# Altium PCB Auto_Follower_Controller.PcbDoc
Units mm, origin at the board's own origin, x right, y up, seen from the top; angles counter-clockwise.
Board outline 156.93 x 77.5 mm, 2 copper layers (Top Layer, Bottom Layer); 24 components, 23 nets, 106 pads, 7 vias.
Unrouted connection lines stored in the file: 23.
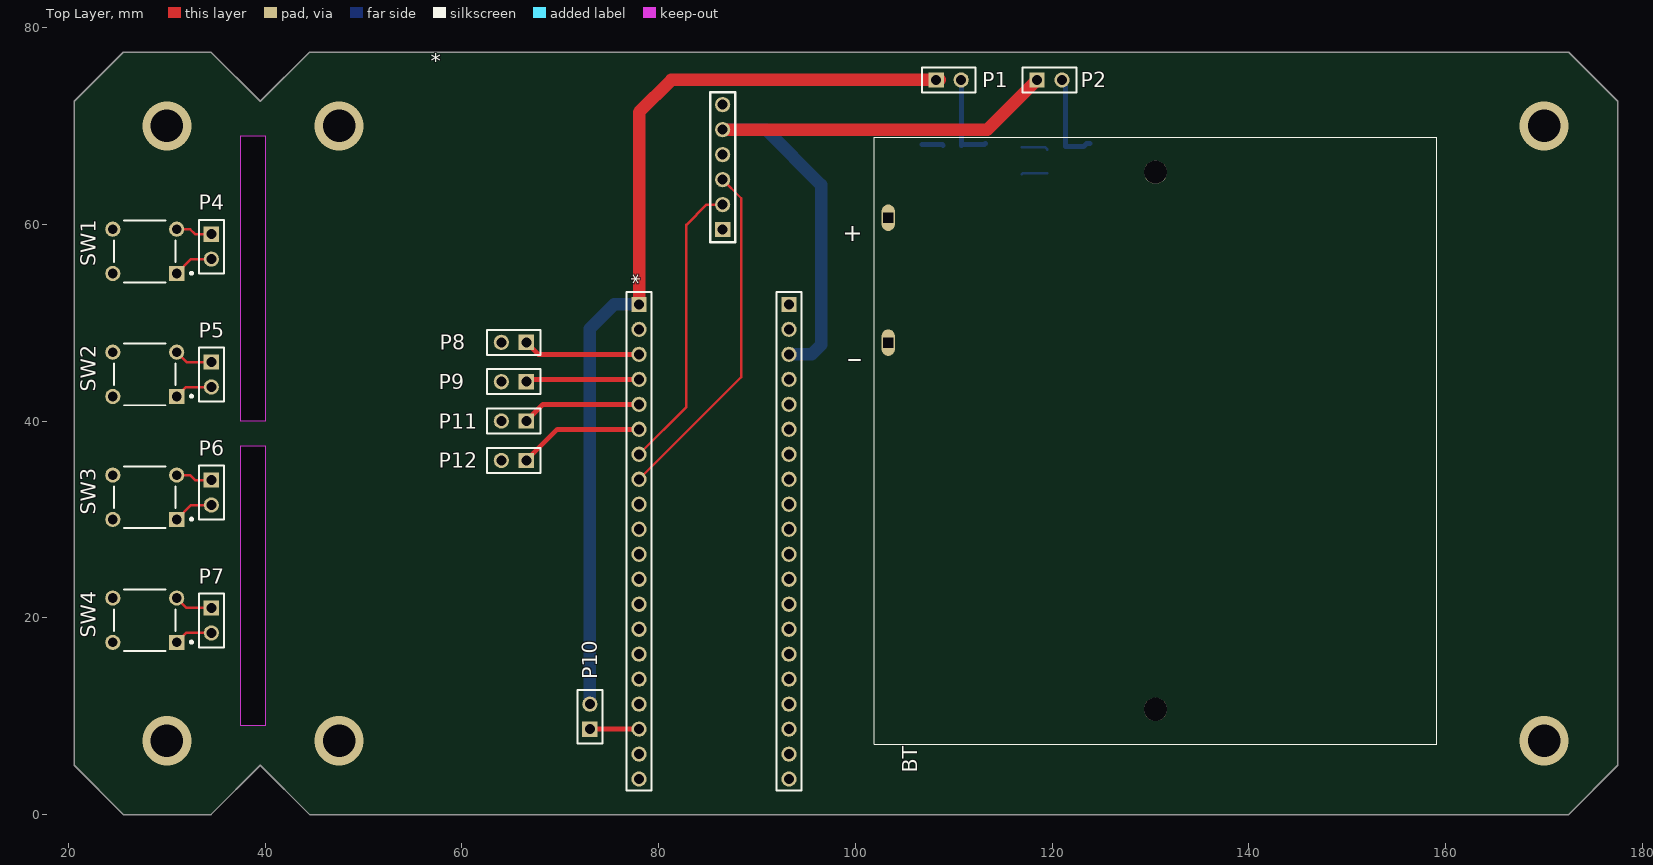
[diagram p0: Top Layer view]
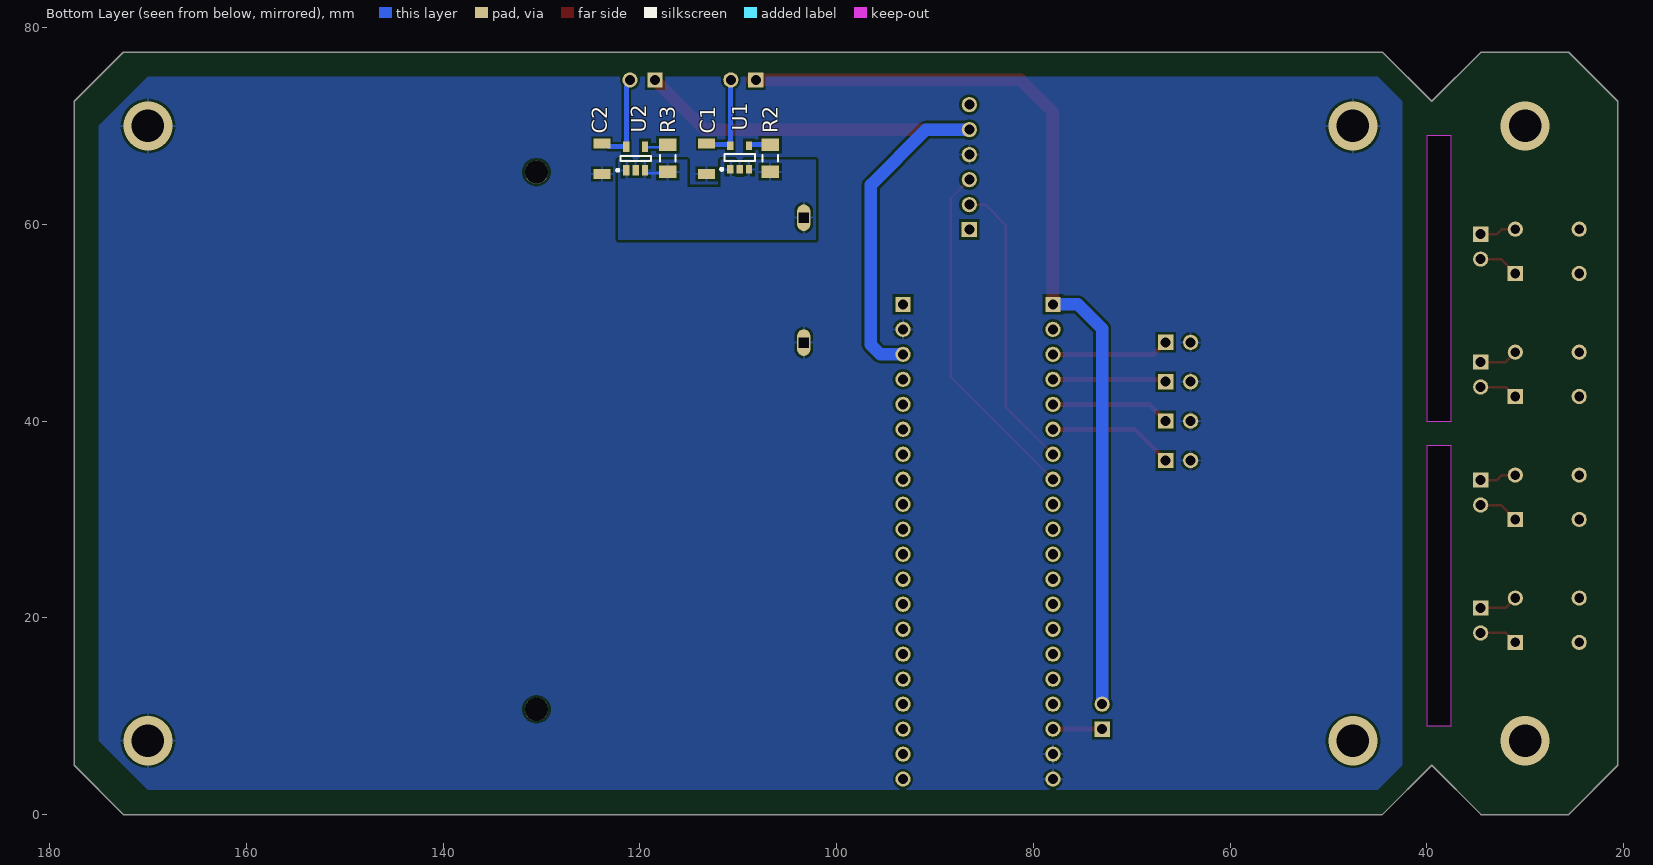
[diagram p1: Bottom Layer view, seen from below]
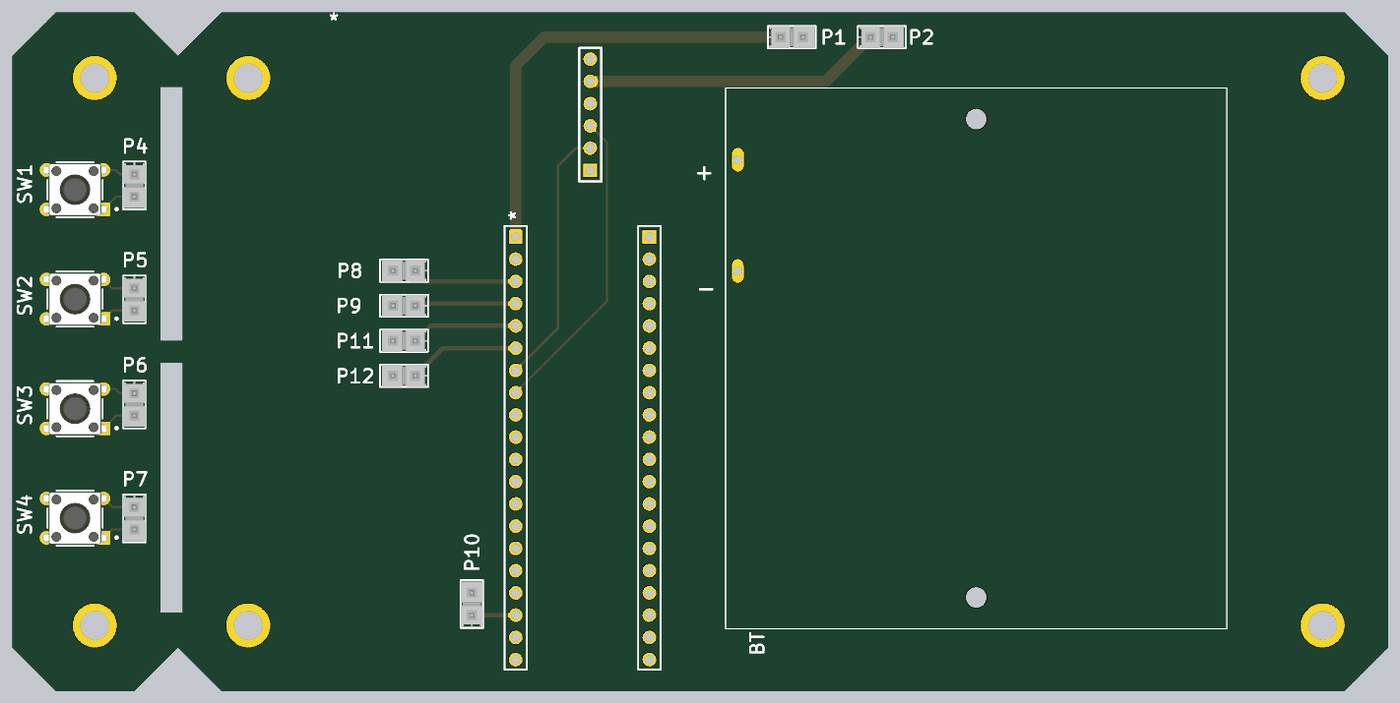
[diagram p2: 3D render of the assembled board from above, using the file's embedded part models]

## Layer stack, top to bottom
Top Solder: solder mask 0.0102, Solder Resist, Dk 3.5
Top Layer: signal copper 0.0356
Dielectric 1: dielectric 0.32, FR-4, Dk 4.8
Bottom Layer: signal copper 0.0356
Bottom Solder: solder mask 0.0102, Solder Resist, Dk 3.5

## Board outline
20.574,72.5 25.574,77.5 27.5,77.5 34.5,77.5 39.5,72.5 44.5,77.5 172.5,77.5 177.5,72.5 177.5,5 172.5,0 44.5,0 39.5,5 34.5,0 27.5,0 25.574,0 20.574,5
cut-out: 40,9 37.5,9 37.5,37.5 40,37.5
cut-out: 37.5,69 40,69 40,40 37.5,40

## Design rules (kind name [scope] priority, off if disabled: settings)
Clearance [All] p1: gap=0.254 ignorepadtopadclearanceinfootprint=TRUE except(0: Arc-Hole Track-Hole SMDPad-Hole THPad-Hole Via-Hole Fill-Hole Poly-Hole Region-Hole Text-Hole; 0.127: Arc-Arc Arc-Track Arc-SMDPad Track-Track Track-SMDPad)
PolygonConnect [All] p1: connectstyle=Relief reliefconductorwidth=0.254 reliefentries=4 polygonreliefangle="90 Angle" airgapwidth=0.254
RoutingVias [All] p1: holewidth=0.711 width=1.27 viastyle="Through Hole" minholewidth=0.711 minwidth=1.27 maxholewidth=2.54 maxwidth=5.08
SolderMaskExpansion [All] p1: expansion=0.102 istentingtop=FALSE
Width [All] p1: maxlimit=2.54 minlimit=0.254 preferedwidth=0.254
30 further rules are at their usual default settings.

## Classes and differential pairs
component class STM32_Interfaces: * P4 P5 P6 P7 P8 P9 P11 P12 SW1 SW2 SW3 SW4
component class STM32: * P10
component class Connectors: BT
component class Power_Tree: C1 C2 P1 P2 R2 R3 U1 U2

## Components (designator, comment, footprint, x,y, rotation, side; value= is the part's Value field where it differs from the comment)
* "HC-05 Bluetooth Module" "HC-05 Bluetooth Module" 86.5,59.46 r90 top
* "STM32-Blue-Pill-Dev" STM32-Blue-Pill-Dev-Headers 78,51.86 r270 top
BT "BH4AA-PC" BAT_BH4AA-PC 130.5,38 r180 top locked
C1 "1206 1uF" FOOTPRINT-1206-GEN 113.212,66.666 r90 bottom value=1uF
C2 "1206 1uF" FOOTPRINT-1206-GEN 123.85,66.666 r90 bottom value=1uF
P1 "TSW-102-26-F-S" SMTC-TSW-102-26-XX-S 108.204,74.676 r0 top
P2 "TSW-102-26-F-S" SMTC-TSW-102-26-XX-S 118.46,74.676 r0 top
P4 "TSW-102-26-F-S" SMTC-TSW-102-26-XX-S 34.519,59 r270 top
P5 "TSW-102-26-F-S" SMTC-TSW-102-26-XX-S 34.519,46 r270 top
P6 "TSW-102-26-F-S" SMTC-TSW-102-26-XX-S 34.519,34 r270 top
P7 "TSW-102-26-F-S" SMTC-TSW-102-26-XX-S 34.519,21 r270 top
P8 "TSW-102-26-F-S" SMTC-TSW-102-26-XX-S 66.54,48 r180 top
P9 "TSW-102-26-F-S" SMTC-TSW-102-26-XX-S 66.54,44 r180 top
P10 "TSW-102-26-F-S" SMTC-TSW-102-26-XX-S 73,8.68 r90 top
P11 "TSW-102-26-F-S" SMTC-TSW-102-26-XX-S 66.54,40 r180 top
P12 "TSW-102-26-F-S" SMTC-TSW-102-26-XX-S 66.54,36 r180 top
R2 "1M" RESC3116X65X50NL20T20 106.738,66.716 r270 bottom
R3 "1M" RESC3116X65X50NL20T20 117.167,66.716 r270 bottom
SW1 "3-1825910-1" FP-3-1825910-1-MFG 27.75,57.25 r180 top
SW2 "3-1825910-1" FP-3-1825910-1-MFG 27.75,44.75 r180 top
SW3 "3-1825910-1" FP-3-1825910-1-MFG 27.75,32.25 r180 top
SW4 "3-1825910-1" FP-3-1825910-1-MFG 27.75,19.75 r180 top
U1 "TC1055-3.3VCT713" SOT-23-CT5_L 109.851,66.791 r90 bottom
U2 "TC1055-5.0VCT713" SOT-23-CT5_N 120.421,66.691 r90 bottom

## Footprints (in the part's own frame and the unit in brackets; to place one, negate y for a bottom-side part, rotate by r counter-clockwise, add the part's x,y. Pads: shape width x height; smd on the part's side, far side on the other; paste and mask are expansions set on the pad)
BAT_BH4AA-PC [mm]
  oval 1.35x2.7 hole 1 square: NEG(27.17,-9.97) POS(27.17,-22.67)
  round 2.36 hole 2.36 unplated: ""(0,27.305) ""(0,-27.305)
  silkscreen extent -28.58,-30.86 28.58,30.86, body extent -28.7,-30.99 28.7,30.99, height 16
FOOTPRINT-1206-GEN [mm] "1/4 Watt"
  rect 1x1.7 smd: 1(-1.55,0) 2(1.55,0)
  body extent -1.6,-0.8 1.6,0.8, height 0.71
FP-3-1825910-1-MFG [mm]
  rect 1.54x1.54 hole 0.99 paste-1000 mask+0: 1(-3.25,2.25)
  round 1.54 hole 0.99 paste-1000 mask+0: 2(3.25,2.25) 3(-3.25,-2.25) 4(3.25,-2.25)
  silkscreen extent -4.87,-3.15 3.15,3.15, body extent -4.12,-3.24 4.12,3.24, height 0.25
"HC-05 Bluetooth Module" [mm]
  rect 1.55x1.55 hole 1.02: 1(0,0)
  round 1.55 hole 1.02: 2(2.54,0) 3(5.08,0) 4(7.62,0) 5(10.16,0) 6(12.7,0)
  silkscreen extent -1.27,-1.27 13.97,1.27, body extent -3.15,-1.99 15.85,29.93, height 2.5
RESC3116X65X50NL20T20 [mm] "Chip Resistor, 2-Leads, Body 3.10x1.60mm, IPC Medium Density"
  rect 1.25x1.8 smd: 1(-1.375,0) 2(1.375,0)
  silkscreen extent -0.35,-0.8 0.35,0.8, body extent -1.65,-0.9 1.65,0.9, height 0.65
SMTC-TSW-102-26-XX-S [mm] ".025 SQ Post Terminal Strip Assembly, 1x2 Pins, Vertical, 2.54mm Pitch, Male"
  rect 1.55x1.55 hole 1.02: 1(0,0)
  round 1.55 hole 1.02: 2(2.54,0)
  silkscreen extent -1.46,-1.27 4,1.27, body extent -1.4,-1.27 3.81,1.27, height 8.38
SOT-23-CT5_L [mm] "SOT23, 5-Leads, Body 2.9x1.7mm, Pitch 0.95mm, Lead Span 2.8mm, IPC High Density"
  rect 0.9x0.65 smd: 1(-1.2,0.95) 2(-1.2,0) 3(-1.2,-0.95) 4(1.2,-0.95) 5(1.2,0.95)
  silkscreen extent -1.32,-1.55 0.35,1.95, body extent -0.9,-1.55 0.9,1.55, height 1.45
SOT-23-CT5_N [mm] "SOT23, 5-Leads, Body 2.9x1.7mm, Pitch 0.95mm, Lead Span 2.8mm, IPC Medium Density"
  rect 1.1x0.65 smd: 1(-1.2,0.95) 2(-1.2,0) 3(-1.2,-0.95) 4(1.2,-0.95) 5(1.2,0.95)
  silkscreen extent -1.32,-1.55 0.25,1.95, body extent -0.9,-1.55 0.9,1.55, height 1.45
STM32-Blue-Pill-Dev-Headers [mm]
  rect 1.55x1.55 hole 1.02: 1(0,0) 21(0,15.24)
  round 1.55 hole 1.02: 2(2.54,0) 3(5.08,0) 4(7.62,0) 5(10.16,0) 6(12.7,0) 7(15.24,0) 8(17.78,0) 9(20.32,0) 10(22.86,0) 11(25.4,0) 12(27.94,0) 13(30.48,0) 14(33.02,0) 15(35.56,0) 16(38.1,0) 17(40.64,0) 18(43.18,0) 19(45.72,0) 20(48.26,0) 22(2.54,15.24) 23(5.08,15.24) 24(7.62,15.24) 25(10.16,15.24) 26(12.7,15.24) 27(15.24,15.24) 28(17.78,15.24) 29(20.32,15.24) 30(22.86,15.24) 31(25.4,15.24) 32(27.94,15.24) 33(30.48,15.24) 34(33.02,15.24) 35(35.56,15.24) 36(38.1,15.24) 37(40.64,15.24) 38(43.18,15.24) 39(45.72,15.24) 40(48.26,15.24)
  silkscreen extent -1.27,-1.27 49.4,16.51

## Part data
BT: "Battery Holder _Open_ AA 4 Cell PC Pin", Package=None, Availability=Unavailable, MF=MPD, MP=BH4AAPC, Price=None, SnapEDA_Link=https://www.snapeda.com/parts/BH4AAPC/MPD/view-part/112528/?ref=snap
C1 C2: library part CMP-001-00085-2, "CAP CER 1UF 50V X7R 1206 ±10% 50V Ceramic Capacitor X7R 1206 (3216 Metric)", Part Number=1276-6781-1-ND, Design Item ID=Capacitor-Generic-1206, LatestRevisionNote="Re-released for DXP Platform.", PackageDescription="Radial Cap, Thru-Hole; 2 Leads; 0.3 in Pin Spacing", PackageReference=RAD-0.3, Published=8-Jun-2000, Publisher="Altium Limited", Source=Generic.SchLib, Type=Capacitor
P1 P2 P4 P5 P6 P7 P8 P9 P10 P11 P12: library part CMP-002-00072-1, "Headers & Wire Housings Classic PCB Header Strips, 0.100 pitch", Flammability Rating="UL94 V-0", Housing Color=Black, Max Current Rating=7.6A, Max Operating Temperature=125°C, Max Voltage Rating (AC)=550V, Min Operating Temperature=-55°C, Package Quantity=1, Voltage Rating=500V, Contact Gender=Male, Contact Material=Bronze, Contact Mating Length=5.84mm, Contact Plating=Gold, Contact Post Length=3.2mm, Contact Type=-, Depth=2.54mm, Gender=Male, Housing Material=Polyester, Length=5.08mm, Number of Contacts=2, Number of Positions=2, Number of Rows=1, Orientation=Vertical, Packaging=Bulk, Pitch=2.54mm, Radiation Hardening=No, REACH SVHC="No SVHC", RoHS Compliant=Yes, Series=TSW, Termination="Through Hole", Weight=0.001257oz
R2 R3: library part CMP-2003-04887-1, "CRCW12061M00FKEAHP / 1M 1206", Manufacturer="Vishay Dale", Part Number=CRCW12061M00FKEAHP
SW1 SW2 SW3 SW4: library part CMP-03407-000001-1, "SWITCH TACTILE SPST-NO 0.05A 24V", Contact Current Rating=50mA, Contact Resistance=100mΩ, Manufacturer="TE Connectivity", Operating Force=160gf, Package=0, Temperature="-35°C to +85°C", Temperature Range High=+85°C, Temperature Range Low=-35°C, Automotive=No, Category=Switch, ComponentLink2Description=Datasheet, ComponentLink2URL=https://www.te.com/commerce/DocumentDelivery/DDEController?Action=srchrtrv&DocNm=1825910&DocType=Customer+Drawing&DocLang=English, Device Class L1=Electromechanical, Device Class L2=Switches, Device Class L3="Tactile Switches", Digikey Description="SWITCH TACTILE SPST-NO 0.05A 24V", Electromechanical Life=100000Cycles, Height=17.3mm, Lead Free=Yes, Manufacturer Part Number=3-1825910-1, Mount="Through Hole", Octopart=https://octopart.com/3-1825910-1-te+connectivity-46506874, RoHS=TRUE, Throw Configuration=SPST-NO
U1: library part CMP-0136-00572-1, "50 mA, 100 mA and 150 mA CMOS LDOs with Shutdown and Active-Low Error Output, 5-Pin SOT-23, Extended Temperature, Tape and Reel", Code_IPC=SOT23-5, DatasheetVersion="revD, Feb-2007", PackageDescription="5-Lead Plastic Small Outline Transistor (CT) [SOT-23]", PackageReference=SOT-23-CT5, PackageVersion="revBB, Aug-2009"
U2: library part CMP-0136-00550-1, "50 mA, 100 mA and 150 mA CMOS LDOs with Shutdown and Active-Low Error Output, 5-Pin SOT-23, Extended Temperature, Tape and Reel", Code_IPC=SOT23-5, DatasheetVersion="revD, Feb-2007", PackageDescription="5-Lead Plastic Small Outline Transistor (CT) [SOT-23]", PackageReference=SOT-23-CT5, PackageVersion="revBB, Aug-2009"

## Via types
v1: diameter 5, hole 3.302, Top Layer to Bottom Layer, 7 vias

## Nets (pads, with @x,y where several pads share a name; then routed paths per layer and width w, separated by ;. In a path a pad name is that pad's centre, name@x,y a point inside that pad or via, vN(x,y) a via of type N, cw(c..) or ccw(c..) an arc to the next point about the centre after c; other vN are vias at no path point)
GND: *.4@86.5,67.08 *.19 *.20 *.22 BT.NEG C1.1 C2.1 P8.2 P9.2 P11.2 P12.2 U1.2 U2.2
  other v1: 170,7.5 47.5,70 170,70
Net*_3: *.3@78,46.78 P8.1 | length 12
  Top Layer w0.508: P8.1 67.76,46.78 *.3@78,46.78
Net*_4: *.4@78,44.24 P9.1 | length 11.6
  Top Layer w0.508: P9.1 66.78,44.24 *.4@78,44.24
Net*_5: *.5@78,41.7 P11.1 | length 12.2
  Top Layer w0.508: P11.1 68.24,41.7 *.5@78,41.7
Net*_6: *.6@78,39.16 P12.1 | length 12.8
  Top Layer w0.508: P12.1 69.7,39.16 *.6@78,39.16
Net*_18: *.18 P10.1 | length 5
  Top Layer w0.508: P10.1 *.18
NetC1_2: C1.2 P1.2 U1.5 | length 9.2
  Bottom Layer w0.508: P1.2 110.773,74.647 110.773,68.019 U1.5 110.801,68.032 110.872,68.103 113.099,68.103 C1.2
NetC2_2: C2.2 P2.2 U2.5 | length 9.6
  Bottom Layer w0.508: P2.2 121,74.394 121.371,74.023 U2.5 123.175,67.891 123.5,68.216 C2.2
NetP4_1: P4.1 SW1.3 | length 3.7
  Top Layer w0.254: SW1.3 32.36,59.5 32.86,59 P4.1
NetP4_2: P4.2 SW1.1 | length 4.1
  Top Layer w0.254: SW1.1 32.46,56.46 P4.2
NetP5_1: P5.1 SW2.3 | length 3.9
  Top Layer w0.254: SW2.3 32,46 P5.1
NetP5_2: P5.2 SW2.1 | length 3.9
  Top Layer w0.254: SW2.1 31.96,43.46 P5.2
NetP6_1: P6.1 SW3.3 | length 3.7
  Top Layer w0.254: SW3.3 32.36,34.5 32.86,34 P6.1
NetP6_2: P6.2 SW3.1 | length 4.1
  Top Layer w0.254: SW3.1 32.46,31.46 P6.2
NetP7_1: P7.1 SW4.3 | length 3.9
  Top Layer w0.254: SW4.3 32,21 P7.1
NetP7_2: P7.2 SW4.1 | length 3.9
  Top Layer w0.254: SW4.1 31.96,18.46 P7.2
NetR2_1: R2.1 U1.4 | length 2.2
  Bottom Layer w0.508: R2.1 108.83,68.091 108.901,68.02 U1.4
NetR3_1: R3.1 U2.4 | length 2.7
  Bottom Layer w0.254: R3.1@116.926,67.841 119.273,67.841 119.471,67.643 U2.4@119.471,67.596
P3V3: *.1@78,51.86 P1.1 P10.2 | length 95.7
  Top Layer w1.27: *.1@78,51.86 78,71.396 81.28,74.676 P1.1@108.557,74.676
  Bottom Layer w1.27: P10.2 73,49.403 75.457,51.86 *.1@78,51.86
P5V: *.5@86.5,69.62 *.23 P2.1 | length 66.3
  Top Layer w1.27: *.5@86.5,69.62 113.404,69.62 P2.1
  Bottom Layer w1.27: *.5@86.5,69.62 90.908,69.62 96.52,64.008 96.52,47.752 95.548,46.78 *.23
P6V: BT.POS R2.2 R3.2 U1.1 U1.3 U2.1 U2.3 | length 2.6
  Bottom Layer w0.254: R3.2@116.926,65.091 117.031,65.196 U2.3@119.471,65.196
RX2: *.3@86.5,64.54 *.8 | length 35.5
  Top Layer w0.254: *.8 88.392,44.472 88.392,62.648 *.3@86.5,64.54
TX2: *.2@86.5,62 *.7 | length 29.9
  Top Layer w0.254: *.7 82.804,41.424 82.804,59.944 84.86,62 *.2@86.5,62
pads on no net: *.1@86.5,59.46 *.2@78,49.32 *.6@86.5,72.16 *.9 *.10 *.11 *.12 *.13 *.14 *.15 *.16 *.17 *.21 *.24 *.25 *.26 *.27 *.28 *.29 *.30 *.31 *.32 *.33 *.34 *.35 *.36 *.37 *.38 *.39 *.40 BT. SW1.2 SW1.4 SW2.2 SW2.4 SW3.2 SW3.4 SW4.2 SW4.4
copper on no net:
  other v1: 30,7.5 47.5,7.5 47.5,7.5 30,70

## Polygon pours and split planes (outlines as drawn)
GND on Bottom Layer "GND" (solid, pour order 3): 45,75 42.5,72.5 42.5,5 45,2.5 170,2.5 175,7.5 175,70 170,75
P6V on Bottom Layer "GND" (solid, pour order 2): 102.108,66.548 102.108,58.42 122.174,58.42 122.174,58.674 122.174,66.548 120.904,66.548 120.904,64.77 119.888,64.77 119.888,66.548 115.189,66.548 115.189,63.754 111.76,63.754 111.76,66.548 110.363,66.548 110.363,64.77 109.347,64.77 109.347,66.548

## Silkscreen, mask and mechanical layers (free items; w line width, h text height)
Mechanical 1:
  lines w0.508: 20.574,5 20.574,72.5 25.574,77.5 27.5,77.5 34.5,77.5 39.5,72.5 44.5,77.5 172.5,77.5 177.5,72.5 177.5,5 172.5,0 44.5,0 39.5,5 34.5,0 27.5,0 25.574,0 20.574,5 ; 37.5,9 37.5,37.5 40,37.5 40,9 37.5,9 ; 37.5,40 37.5,69 40,69 40,40 37.5,40

## Text inside footprints (layer, text, board x,y; h text height)
BT: Top Overlay "+" at 100.755,59.82 h1.78 r180; Top Overlay "_" at 100.555,45.72 h1.78 r180